# Altium PCB card.PcbDoc
Units mil, origin at the board's own origin, x right, y up, seen from the top; angles counter-clockwise.
Board outline 6000 x 4000 mil, 2 copper layers (Top Layer, Bottom Layer); 45 components, 33 nets, 210 pads, 63 vias.
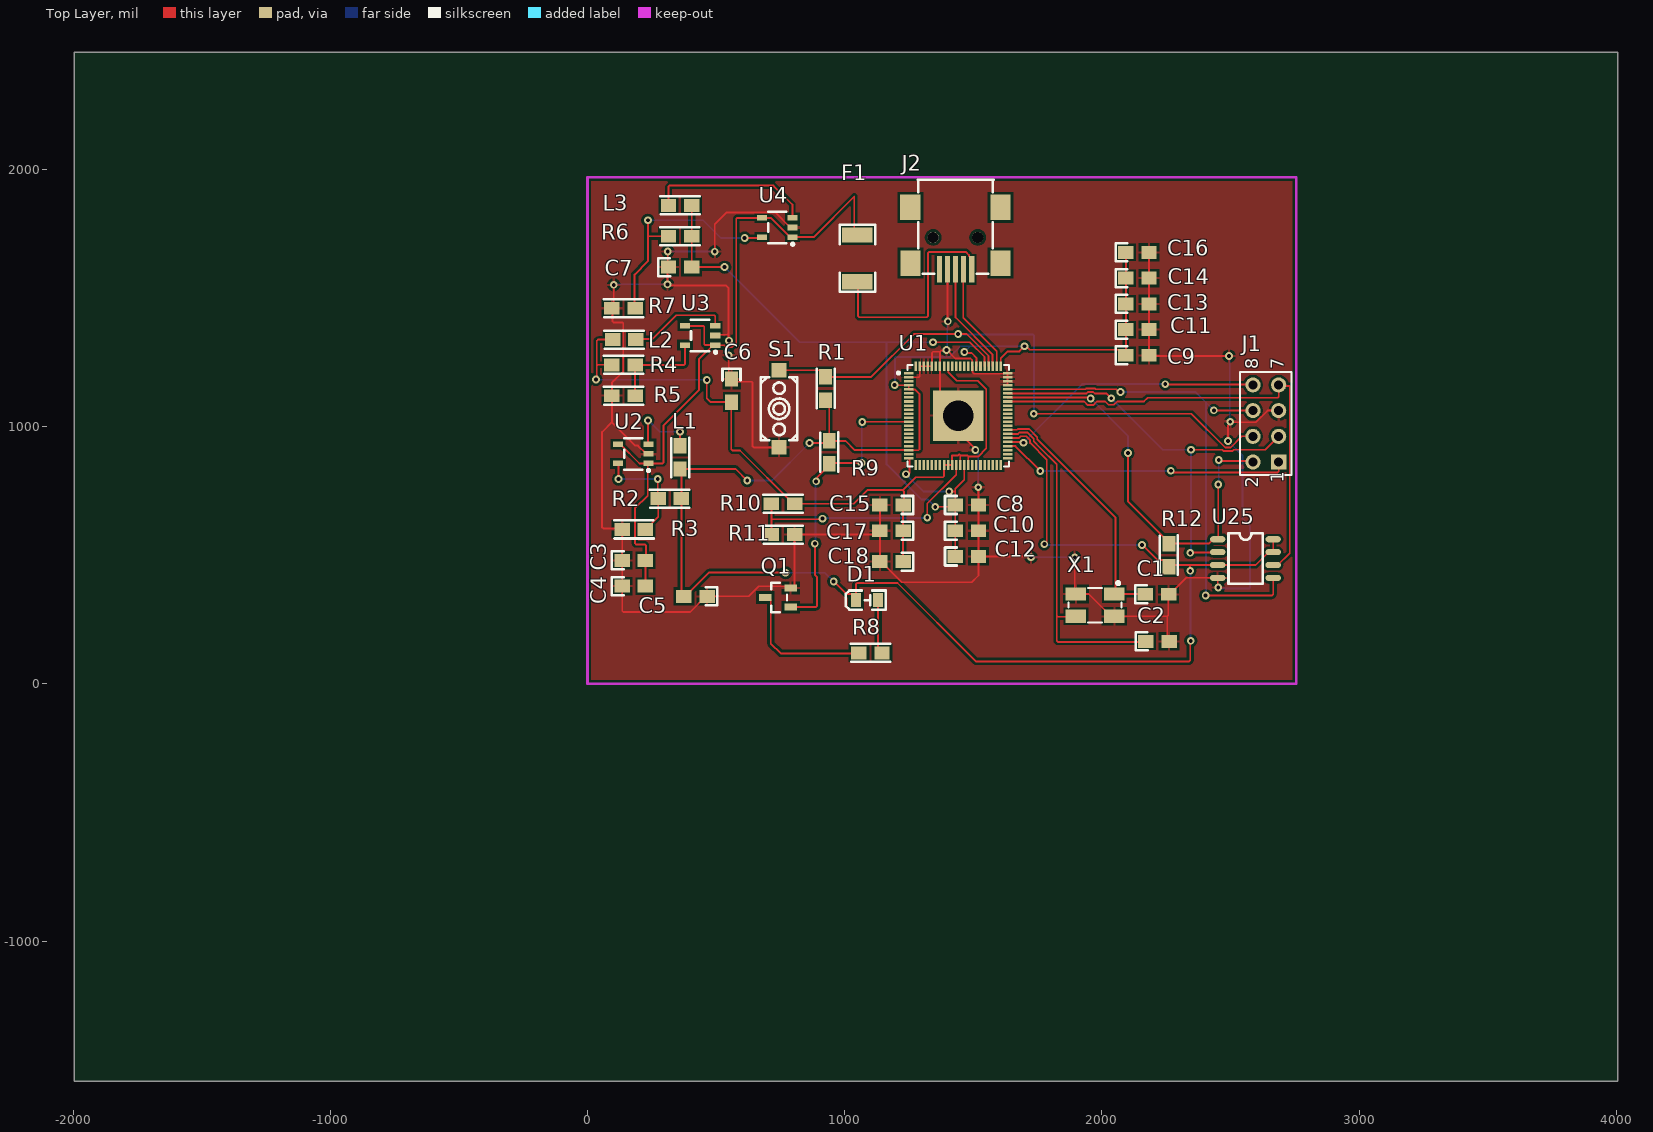
[diagram p0: Top Layer view]
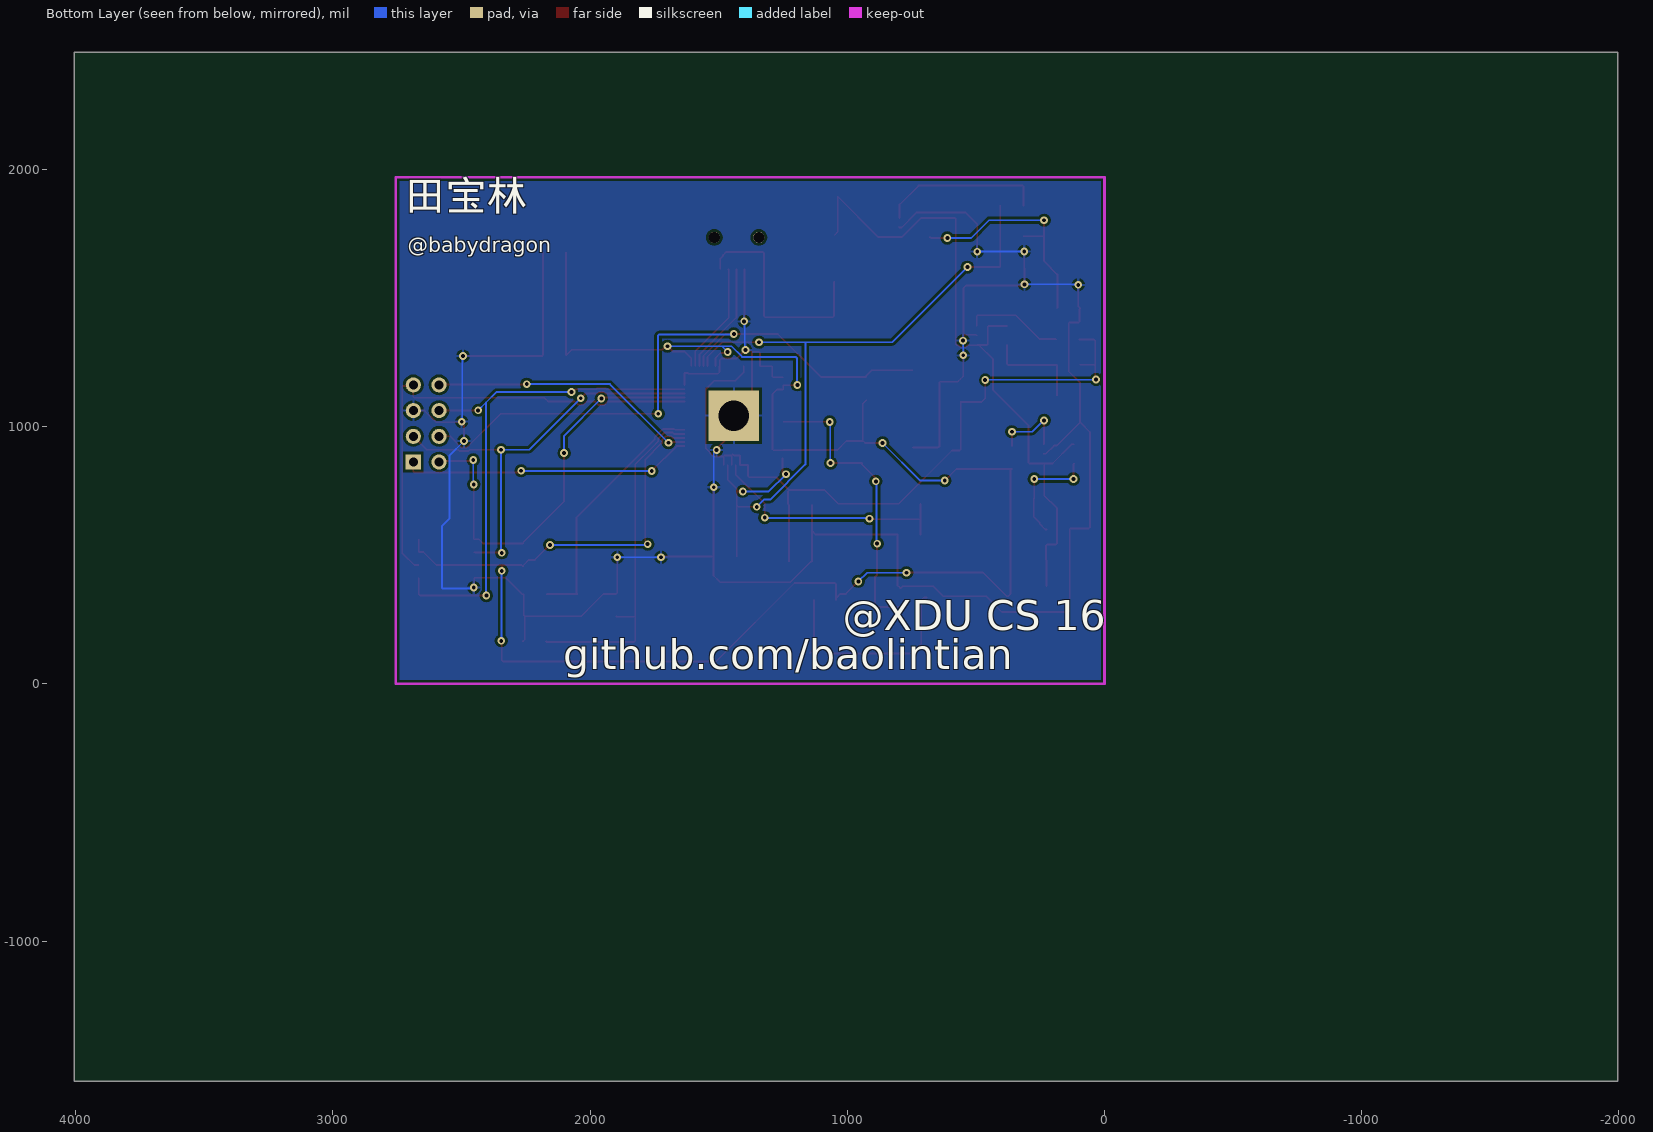
[diagram p1: Bottom Layer view, seen from below]

## Layer stack, top to bottom
Top Solder: solder mask 0.4, Solder Resist, Dk 3.5
Top Layer: signal copper 1.4
Dielectric1: dielectric 12.6, FR-4, Dk 4.8
Bottom Layer: signal copper 1.4
Bottom Solder: solder mask 0.4, Solder Resist, Dk 3.5

## Board outline
-1995,-1545 4005,-1545 4005,2455 -1995,2455

## Design rules (kind name [scope] priority, off if disabled: settings)
Clearance [All] p1: gap=7 ignorepadtopadclearanceinfootprint=TRUE
FabricationTestPointUsage TestPointUsage [All] p1: valid=0 allowmultiple=FALSE
FabricationTestpoint Testpoint [All] p1: side=3 testpointundercomponent=TRUE minsize=40 maxsize=100 preferedsize=60 minholesize=0 maxholesize=40 preferedholesize=32 testpointgrid=1 allowsidetop=TRUE allowsidebottom=TRUE usegrid=TRUE gridtolerance=0.01
HoleSize [All] p1: absolutevalues=TRUE maxlimit=10000 minlimit=1 maxpercent=80.000 minpercent=20.000
PolygonConnect [All] p1: connectstyle=Relief reliefconductorwidth=10 reliefentries=4 polygonreliefangle="90 Angle" airgapwidth=10
RoutingVias [All] p1: holewidth=15 width=30 viastyle="Through Hole" minholewidth=12 minwidth=24 maxholewidth=1000 maxwidth=1000
SMDNeckDown [All] p1: percent=95.000
SolderMaskExpansion [All] p1: expansion=4
Width [All] p1: maxlimit=100 minlimit=7 preferedwidth=7
27 further rules are at their usual default settings.

## Components (designator, comment, footprint, x,y, rotation, side; value= is the part's Value field where it differs from the comment)
C1 "30p" C0805 2214,348 r0 top value=100pF
C2 "30p" C0805 2216,165 r0 top value=100pF
C3 "2u2" C0805 180,480 r0 top value=100pF
C4 "2u2" C0805 180,380 r0 top value=100pF
C5 "22u" C0805 420,340 r180 top value=100pF
C6 "22u" C0805 560,1140 r270 top value=100pF
C7 "22u" C0805 360,1620 r0 top value=100pF
C8 "100n" C0805 1475,695 r0 top value=100pF
C9 "2u2" C0805 2138,1277 r0 top value=100pF
C10 "100n" C0805 1475,595 r0 top value=100pF
C11 "100n" C0805 2138,1377 r0 top value=100pF
C12 "100n" C0805 1475,495 r0 top value=100pF
C13 "100n" C0805 2138,1477 r0 top value=100pF
C14 "100n" C0805 2138,1577 r0 top value=100pF
C15 "1u" C0805 1182,695 r180 top value=100pF
C16 "100n" C0805 2138,1677 r0 top value=100pF
C17 "1u" C0805 1182,595 r180 top value=100pF
C18 "100n" C0805 1182,475 r180 top value=100pF
D1 "LED" LED-0805 1084,330 r0 top
F1 "Fuse 1" polyfuse 1037,1665 r90 top
J1 "Header4*2" HDR2X4 2687,862 r90 top
J2 "Mini_USB" MINi_USB_2 1431,1744 r180 top
L1 "2u2" R0805 360,880 r270 top value=10mH
L2 "2u2" R0805 143,1338 r180 top value=10mH
L3 "2u2" R0805 360,1860 r0 top value=10mH
Q1 "AO3400" SOT-23 739,344 r0 top
R1 "49.9K" R0805 926,1148 r90 top value=1K
R2 "49.9K" R0805 320,720 r180 top value=1K
R3 "11K" R0805 180,600 r0 top value=1K
R4 "36K" R0805 140,1240 r0 top value=1K
R5 "11K" R0805 140,1120 r0 top value=1K
R6 "8K2" R0805 360,1740 r180 top value=1K
R7 "10K" R0805 140,1460 r0 top value=1K
R8 "R" R0805 1100,120 r0 top value=1K
R9 "49K9" R0805 940,900 r90 top value=1K
R10 "2K2" R0805 760,700 r0 top value=1K
R11 "2K2" R0805 760,580 r0 top value=1K
R12 "3.3K" R0805 2260,500 r90 top value=1K
S1 "SW-PB" SW-2 746,1068 r90 top
U1 "F1C100S" QFN-88 1440,1020 r0 top
U2 "JW5211" SOT-23-5 180,900 r0 top
U3 "JW5211" SOT-23-5 440,1360 r0 top
U4 "JW5211" SOT-23-5 740,1780 r0 top
U25 "AT25SF081-SSHD-T" AT25SF081-SSHD-T 2560,480 r270 top
X1 "24MHz" 5032_4P_24M 1972.37,306.5 r180 top

## Footprints (in the part's own frame and the unit in brackets; to place one, negate y for a bottom-side part, rotate by r counter-clockwise, add the part's x,y. Pads: shape width x height; smd on the part's side, far side on the other; paste and mask are expansions set on the pad)
5032_4P_24M [mm]
  rect 2x1.3 smd: 1(-1.921,-1.079) 2(1.879,-1.079) 3(1.879,1.121) 4(-1.921,1.121)
  silkscreen extent -2.62,-2.31 2.58,1.72
AT25SF081-SSHD-T [mm]
  oval 0.6x1.518 smd: 1(-2.082,-2.797) 2(-0.812,-2.797) 3(0.458,-2.797) 4(1.728,-2.797) 5(1.728,2.683) 6(0.458,2.683) 7(-0.812,2.683) 8(-2.082,2.683)
  silkscreen extent -2.67,-1.73 2.32,1.64
C0805 [mil]
  rect 60x50 smd: 1(-45,0) 2(45,0)
  silkscreen extent -85,-35 -39,35
HDR2X4 [mm] "Connector; Header; 4x2 Position"
  rect 1.5x1.5 hole 0.9: 1(0,0)
  round 1.5 hole 0.9: 2(0,2.54) 3(2.54,0) 4(2.54,2.54) 5(5.08,0) 6(5.08,2.54) 7(7.62,0) 8(7.62,2.54)
  silkscreen extent -1.27,-1.27 8.89,3.81
LED-0805 [mm]
  rect 1x1.4 smd: 1(-1.032,-0.117) 2(1.168,-0.117)
  silkscreen extent -2.03,-1.07 1.92,0.83
MINi_USB_2 [mil]
  rect 78.8x98.5 smd: 0(-174.6,-107.97) 0(175.8,-107.97)
  rect 78.8x98.4 smd: 0(-174.6,108.58)
  rect 78.7x98.4 smd: 0(175.75,108.58)
  rect 19.6x102.4 smd: 1(-62.8,132.48) 2(-31.3,132.48) 3(0.2,132.48) 4(31.7,132.48) 5(63.2,132.48)
  round 43.31 hole 43.31 unplated: ""(-86,8.58) ""(87.2,8.58)
  silkscreen extent -149,-216 146,150
polyfuse [mm]
  rect 1.5x3 smd: 1(-2.586,-0.307) 2(2.024,-0.307)
  silkscreen extent -3.58,-2.06 3.02,1.44
QFN-88 [mm]
  rect 0.95x0.249 smd: 1(-4.844,4.769) 3(-4.844,3.969) 5(-4.844,3.169) 7(-4.844,2.369) 9(-4.844,1.569) 11(-4.844,0.769) 13(-4.844,-0.031) 14(-4.844,-0.43) 15(-4.844,-0.831) 16(-4.844,-1.23) 17(-4.844,-1.631) 18(-4.844,-2.03) 19(-4.844,-2.432) 20(-4.844,-2.83) 22(-4.844,-3.63) 45(4.907,-3.63) 47(4.907,-2.83) 48(4.907,-2.432) 49(4.907,-2.03) 50(4.907,-1.631) 51(4.907,-1.23) 52(4.907,-0.831) 53(4.907,-0.43) 54(4.907,-0.031) 56(4.907,0.769) 58(4.907,1.569) 60(4.907,2.369) 62(4.907,3.169) 64(4.907,3.969) 66(4.907,4.769)
  rect 0.95x0.251 smd: 2(-4.844,4.369) 4(-4.844,3.569) 6(-4.844,2.769) 8(-4.844,1.969) 10(-4.844,1.169) 12(-4.844,0.369) 21(-4.844,-3.23) 46(4.907,-3.23) 55(4.907,0.369) 57(4.907,1.169) 59(4.907,1.969) 61(4.907,2.769) 63(4.907,3.569) 65(4.907,4.369)
  rect 0.249x0.95 smd: 23(-4.169,-4.306) 24(-3.77,-4.306) 25(-3.369,-4.306) 26(-2.97,-4.306) 27(-2.569,-4.306) 28(-2.17,-4.306) 30(-1.37,-4.306) 32(-0.57,-4.306) 34(0.231,-4.306) 36(1.031,-4.306) 38(1.831,-4.306) 40(2.631,-4.306) 42(3.431,-4.306) 44(4.231,-4.306) 67(4.231,5.445) 69(3.431,5.445) 71(2.631,5.445) 73(1.831,5.445) 75(1.031,5.445) 77(0.231,5.445) 79(-0.57,5.445) 81(-1.37,5.445) 83(-2.17,5.445) 84(-2.569,5.445) 85(-2.97,5.445) 86(-3.369,5.445) 87(-3.77,5.445) 88(-4.169,5.445)
  rect 0.251x0.95 smd: 29(-1.77,-4.306) 31(-0.97,-4.306) 33(-0.17,-4.306) 35(0.631,-4.306) 37(1.431,-4.306) 39(2.231,-4.306) 41(3.031,-4.306) 43(3.831,-4.306) 68(3.831,5.445) 70(3.031,5.445) 72(2.231,5.445) 74(1.431,5.445) 76(0.631,5.445) 78(-0.17,5.445) 80(-0.97,5.445) 82(-1.77,5.445)
  rect 5x5 hole 3: 89(0.031,0.569)
  silkscreen extent -5.99,-4.43 5.03,5.57
R0805 [mil]
  rect 60x50 smd: 1(-45,0) 2(45,0)
  silkscreen extent -76,-35 77,35
SOT-23 [mm]
  rect 1.25x0.7 smd: 1(1.296,-1.166) 2(1.296,0.734) 3(-1.204,-0.216)
  silkscreen extent -0.6,-1.68 0.95,1.24
SOT-23-5 [mm]
  rect 1x0.55 smd: 1(1.443,-1.102) 2(1.443,-0.152) 3(1.443,0.798) 4(-1.557,0.798) 5(-1.557,-1.102)
  silkscreen extent -0.96,-1.93 1.59,1.4
SW-2 [mm]
  rect 1.4x1.5 smd: 1(-3.77,0.022) 2(3.83,0.022)
  silkscreen extent -3.07,-1.78 3.13,1.82

## Part data
C1 C2 C3 C4 C5 C6 C7 C8 C9 C10 C11 C12 C13 C14 C15 C16 C17 C18: library part Cap, "Capacitor", LatestRevisionDate=17-Jul-2002, LatestRevisionNote="Re-released for DXP Platform.", PackageDescription="Radial Cap, Thru-Hole; 2 Leads; 0.3 in Pin Spacing", PackageReference=RAD-0.3, Published=8-Jun-2000, Publisher="Altium Limited"
D1: library part LED0, "Typical INFRARED GaAs LED", LatestRevisionDate=08-Jul-2005, LatestRevisionNote="Mech Layer 1 removed.", PackageDescription="LED; 2 Leads", PackageReference=LED-0, Published=8-Jun-2000, Publisher="Altium Limited"
F1: "Fuse", LatestRevisionDate=17-Jul-2002, LatestRevisionNote="Re-released for DXP Platform.", PackageDescription="Thru-Hole; 2 Leads", PackageReference=PIN-W2/E2.8, Published=8-Jun-2000, Publisher="Altium Limited"
L1 L2 L3: library part Inductor, "Inductor", Code_IEC=1005, Code_JEITA=0402, LatestRevisionDate=29-May-2009, LatestRevisionNote="IPC-7351 Footprint Added.", PackageDescription="Chip Inductor", PackageReference=0402-A, Published=8-Jun-2000, Publisher="Altium Limited"
Q1: "N-Channel Power MOSFET", ComponentLink1Description="Manufacturer Link", ComponentLink1URL=http://www.irf.com/, DatasheetVersion=PD-9.814, LatestRevisionDate=17-Jul-2002, LatestRevisionNote="Re-released for DXP Platform.", Note="Pin 2 is electrically connected to pin 4.", PackageDescription="TO, Thru-Hole, Vertical, Heatsink Mounted; 3 In-Line Leads; Pitch 2.54 mm", PackageReference=TO-220AB, PackageVersion=Feb-1997, Published=8-Jun-2000, Publisher="Altium Limited"
R1 R2 R3 R4 R5 R6 R7 R8 R9 R10 R11 R12: library part Res1, "Resistor", LatestRevisionDate=17-Jul-2002, LatestRevisionNote="Re-released for DXP Platform.", PackageDescription="Axial Device, Thru-Hole; 2 Leads; 0.3 in Pin Spacing", PackageReference=AXIAL-0.3, Published=8-Jun-2000, Publisher="Altium Limited"
S1: "Switch", LatestRevisionDate=17-Jul-2002, LatestRevisionNote="Re-released for DXP Platform.", PackageReference=SPST-2, Published=24-Mar-1999, Publisher="Altium Limited"
U1: "树莓派 全志"
U2 U3 U4: BOM_LCSC Assembly=Yes, BOM_Manufacturer="JoulWatt Tech", BOM_Manufacturer Part=JW5211, BOM_Supplier=LCSC, BOM_Supplier Part=C371423, Contributor=LCSC, SMT Type=Extend, spicePre=U, spiceSymbolName=JW5211
X1: BOM_LCSC Assembly=Yes, BOM_Manufacturer="Nihon Dempa Kogyo", BOM_Manufacturer Part=NX3225GA-24MHZ(STD-CRG-2), BOM_Supplier=LCSC, BOM_Supplier Part=C156248, Contributor=LCSC, nameAlias=Frequency, SMT Type=Extend, spicePre=X, spiceSymbolName=NX3225GA-24MHZ(STD-CRG-2)

## Via types
v1: diameter 30, hole 15, Top Layer to Bottom Layer, 62 vias
v2: diameter 25.98, hole 12.99, Top Layer to Bottom Layer, 1 vias

## Nets (pads, with @x,y where several pads share a name; then routed paths per layer and width w, separated by ;. In a path a pad name is that pad's centre, name@x,y a point inside that pad or via, vN(x,y) a via of type N, cw(c..) or ccw(c..) an arc to the next point about the centre after c; other vN are vias at no path point)
+1V1: C7.2 C8.1 C10.1 C12.1 L3.2 R6.1 U1.22 U1.35 U1.71 | length 3038.5
  Top Layer w7: L3.2 R6.1 C7.2 v1(533,1620) ; v1(1238,815) 1242.1,819.1 1252,819.1 1252,875.67 1250.6,877.07 U1.22 ; v1(1343,1328) 1486,1328 1543.58,1270.42 U1.71 ; v1(1352,688) 1423,688 C8.1 ; v1(1406,748) 1430,748 ; C12.1 C10.1 C8.1 ; U1.35 1464.83,793.47 1430,758.65 1430,748 ; C8.1 1430,748
  Bottom Layer w7: v1(533,1620) 825,1328 1163,1328 ; v1(1238,815) 1305,748 v1(1406,748) ; v1(1343,1328) 1163,1328 ; v1(1352,688) 1352,689 1325,716 1300,716 1163,853 1163,1328
+2V5: C6.2 C15.1 C17.1 C18.1 L2.2 R4.1 R10.2 U1.30 U1.31 U1.32 U1.34 U1.36 U1.80 | length 3067.8
  Top Layer w7: v1(33,1183) 36,1186 36,1235.9 ; R4.1 40.1,1240 36,1235.9 ; L2.2 41,1338 36,1333 36,1235.9 ; v1(464,1181) 464,1110 479,1095 C6.2 559,1094 559,911.1 563.1,907 593,907 800,700 R10.2 1035,700 1088,753 1225.9,753 ; C18.1 C17.1 C15.1 1230,698 1230,748.9 1225.9,753 ; U1.80 1402.18,1234.02 1402.18,1211.32 1435.24,1178.26 1517.09,1178.26 1550.15,1145.19 1550.15,915.09 1518.56,883.5 1480.87,883.5 1480.58,883.8 ; U1.34 1449.08,887.9 ; U1.36 1480.58,883.8 ; 1225.9,753 1275.9,803 1381.98,803 1386.08,807.1 U1.30 U1.31 U1.32 1417.58,887.9 1440.87,887.9 1444.98,892 1449.08,887.9 ; 1449.08,887.9 1476.48,887.9 1480.58,883.8
  Bottom Layer w7: v1(33,1183) 34,1182 463,1182 v1(464,1181)
+3V3: C5.2 C9.1 C11.1 C13.1 C14.1 C16.1 D1.1 L1.2 R1.1 R2.1 R9.2 R12.1 U1.4 U1.5 U1.20 U1.50 U1.67 U1.73 U25.3 U25.7 U25.8 | length 7877.3
  Top Layer w7: v1(621,790) 576,835 L1.2 365,830 R2.1 365,350 C5.2 380,340 473,433 769,433 v1(770,432) ; v1(863,936) 931,936 R9.2 ; R1.1 940,1089 R9.2 ; v1(957,398) 1005.54,349.46 1027.18,349.46 D1.1@1043.37,333.28 ; D1.1 D1.1@1043.37,333.28 ; v1(1194,1162) 1195.13,1160.87 1248.93,1160.87 U1.4 U1.5 1249.58,1144.47 1272.33,1144.47 1291,1125.79 1291,912.1 1286.9,908 1278.74,908 1278.48,908.27 1249.58,908.27 U1.20 1039.43,908.57 1004,944 941,944 R9.2 ; v1(1465,1290) 1469,1286 1494,1286 1512.08,1267.92 U1.73 ; U1.67 1606.58,1265.58 1633,1292 1679,1292 v1(1699,1312) 1705.22,1312 1718.72,1298.5 2071.5,1298.5 C9.1 C11.1 C13.1 C14.1 C16.1 ; U1.50 1677.71,955.77 1684.44,962.5 1705.56,962.5 1720.5,947.56 1720.5,936.7 1785.5,871.7 1785.5,552.5 v1(1776,543) ; v1(2156,540) 2214.5,481.5 2238.5,481.5 2260,460 R12.1 2266.97,461.97 2342,461.97 ; v1(2343,439) 2342,440 2342,461.97 ; v1(2345,167) 2343,165 2343,91.1 2338.9,87 1510.2,87 1205.2,392 1047.47,392 1043.37,387.9 D1.1@1043.37,333.28 ; U25.8 U25.7 2647.56,511.97 2597.56,461.97 U25.3 2342,461.97
  Bottom Layer w7: v1(621,790) 717,790 v1(863,936) ; v1(770,432) 923,432 v1(957,398) ; v1(1194,1162) 1194,1165 1196,1167 1196,1266 1201,1271 1409,1271 1450,1312 1487,1312 ; v1(1465,1290) 1487,1312 ; v1(1699,1312) 1487,1312 ; v1(1776,543) 1779,540 v1(2156,540) ; v1(2343,439) 2344,438 2344,168 v1(2345,167)
FUSE_PWR: C3.2 C4.2 F1.2 U2.1 U2.4 U3.1 U3.4 U4.1 U4.4 | length 2758.3
  Top Layer w7: U2.4 127.54,931.4 202.35,856.6 U2.1 ; C4.2 C3.2 227,482 227,537.9 222.9,542 188.6,542 184.5,546.1 184.5,681.88 234.5,731.88 234.5,854.3 U2.1 ; U3.4 449.9,1391.4 454,1387.3 454,1320.7 458.1,1316.6 U3.1@487.94,1316.6 ; F1.2 1037,1756.77 1037,1894.33 879.27,1736.6 U4.1 787.94,1736.6 713.13,1811.4 U4.4 582.1,1811.4 578,1807.3 578,1320.1 573.9,1316 568.06,1316 560.56,1308.5 539.44,1308.5 531.94,1316 497.39,1316 U3.1 U3.1@487.94,1316.6 ; U2.1 237.2,857 291.9,857 296,861.1 296,1005 433,1142 433,1261.66 U3.1@487.94,1316.6
GND: C1.2 C2.2 C3.1 C4.1 C5.1 C6.1 C7.1 C8.2 C9.2 C10.2 C11.2 C12.2 C13.2 C14.2 C15.2 C16.2 C17.2 C18.2 J1.5 J2.4 Q1.2 R3.1 R5.1 R7.1 R11.2 S1.1 U1.2 U1.63 U1.64 U1.65 U1.66 U1.74 U1.82 U1.84 U1.85 U1.86 U1.87 U1.89 U2.2 U3.2 U4.2 U25.4 X1.2 X1.4 | length 10772.7
  Top Layer w7: v1(102,1551) 102,1467 R7.1 97,1458 97,1409.1 101.1,1405 134.9,1405 139,1400.9 139,1214.15 95,1170.15 R5.1 95,1017 ; U2.2 227.94,894 195.94,926 186,926 95,1017 ; v1(312,1681) 312,1617 311,1616 v1(311,1553) 315,1549 538,1549 548,1539 548,1361.1 ; v1(495,1680) 495,1787 540.73,1832.73 729.21,1832.73 787.94,1774 U4.2 U4.2@799.8,1777 ; U3.2 499.8,1357 543.9,1357 548,1361.1 ; v1(549,1277) 549,1196 C6.1 571,1174 637.9,1174 642,1169.9 642,923.1 646.1,919 744.57,919 S1.1 ; v1(550,1334) 548,1336 548,1361.1 ; C15.2 C17.2 ; U1.2 1287.9,1192.02 1292,1196.12 1292,1233.94 U1.87 U1.86 U1.85 U1.84 1338.88,1286.12 1343.65,1290.9 1370.33,1290.9 ; J2.4 1400.15,1610.67 1400.15,1409.85 v1(1401,1409) ; v1(1508,909) 1508,913 1441.18,979.82 v2(1441.18,1042.37) 1370.33,1113.22 U1.82 1370.33,1290.9 ; v1(1519,764) 1520,763 C8.2 C10.2 C12.2 ; U1.63 U1.64 U1.65 U1.66 1619.38,1207.77 1616.78,1205.17 1502.83,1205.17 1496.68,1211.32 1496.68,1234.02 U1.74 1495.98,1234.72 1495.98,1257.42 1488.89,1264.5 1429.5,1264.5 v1(1396,1298) 1393,1295 1374.43,1295 1370.33,1290.9 ; v1(1724,492) 1721,495 C12.2 ; v1(1894,492) 1894,353.39 X1.2 1948.26,349 2012.13,285.13 2012.13,284.48 2034.22,262.39 X1.4 2253.9,262.39 ; C16.2 C14.2 C13.2 C11.2 C9.2 2186,1274 v1(2494,1274) ; C2.2 2253.9,172.1 2253.9,262.39 ; v1(2452,374) 2449.88,376.12 U25.4 2327.97,411.97 2264,348 C1.2 2258,347 2258,266.49 2253.9,262.39 ; v1(2490,944) 2490,1003.78 2499,1012.78 v1(2499,1019) 2501,1017 2598.61,1017 2643.61,1062 J1.5 ; 95,1017 57,979 57,608.1 61.1,604 131,604 R3.1 C3.1 C4.1 135,283.1 139.1,279 399,279 460,340 C5.1 627,340 666,379 783.89,379 Q1.2 794.72,372.88 805,383.16 R11.2 1122,580 C17.2 ; C17.2 C18.2 1142,475 1222,395 1494,395 1520,421 C12.2
  Bottom Layer w7: v1(102,1551) 104,1553 v1(311,1553) ; v1(312,1681) 494,1681 v1(495,1680) ; v1(549,1277) 549,1333 v1(550,1334) ; v1(1396,1298) 1398.5,1300.5 1398.5,1406.5 v1(1401,1409) ; v1(1508,909) 1519,898 v1(1519,764) ; v1(1724,492) v1(1894,492) ; v1(2452,374) 2456,370 2571.9,370 2576,374.1 2576,612.94 2546.97,641.97 2546.97,887.03 v1(2490,944) ; v1(2494,1274) 2496.5,1271.5 2496.5,1021.5 v1(2499,1019)
JTAG_TCK: U1.53
JTAG_TDI: U1.57
JTAG_TDO: U1.55
JTAG_TMS: U1.58
NetC1_1: C1.1 U1.52 X1.1 | length 989.4
  Top Layer w7: U1.52 1669.61,987.27 1672.84,990.5 1717.16,990.5 1748.5,959.16 1748.5,950.5 2053,646 2053,354 X1.1 2168,349 C1.1
NetC2_1: C2.1 U1.51 X1.3 | length 1362.5
  Top Layer w7: U1.51 1673.71,971.57 1678.64,976.5 1711.36,976.5 1734.5,953.36 1734.5,942.5 1759.1,917.9 1824,853 1824,265.1 ; X1.3 1897.01,261 1828.1,261 1824,265.1 ; C2.1 2169,163 1828.1,163 1824,167.1 1824,265.1
NetD1_2: D1.2 R8.2 | length 211.6
  Top Layer w7: D1.2 1129.98,135.02 R8.2
NetL1_1: L1.1 U2.3 | length 291.6
  Top Layer w7: v1(235,1024) 235,933.2 U2.3 ; L1.1 v1(360,980)
  Bottom Layer w7: v1(235,1024) 237,1024 281,980 v1(360,980)
NetL2_1: L2.1 U3.3 | length 387.3
  Top Layer w7: L2.1 191,1341 253,1341 345,1433 492.7,1433 496.8,1428.9 U3.3
NetL3_1: L3.1 U4.3 | length 638.8
  Top Layer w7: L3.1 315,1932.9 319.1,1937 723,1937 796.8,1863.2 U4.3
NetQ1_3: Q1.3 R8.1 | length 553.3
  Top Layer w7: Q1.3 702.43,335.48 712.71,325.2 712.71,156.29 751,118 1053,118 R8.1
NetR2_2: R2.2 R3.2 U2.5 | length 434
  Top Layer w7: U2.5 121,854.28 v1(121,796) ; R3.2 230,600 251.5,621.5 251.5,626.5 275,650 R2.2 273,722 v1(273,796)
  Bottom Layer w7: v1(121,796) v1(273,796)
NetR4_2: R4.2 R5.2 U3.5 | length 389.7
  Top Layer w7: R5.2 R4.2 186,1239 374.9,1239 379,1243.1 379,1316 378.69,1316.31 U3.5
NetR6_2: R6.2 R7.2 U4.5 | length 919.4
  Top Layer w7: R7.2 183,1462 183,1591 235,1643 235,1743.1 ; v1(235,1802) 235,1743.1 ; R6.2 238.1,1740 235,1743.1 ; v1(611,1733) 675.09,1733 U4.5
  Bottom Layer w7: v1(235,1802) 449,1802 518,1733 v1(611,1733)
NetR10_1: R10.1 R11.1 U1.33 | length 979.5
  Top Layer w7: R11.1 715,640 ; R10.1 715,640 ; v1(914,642) 912,640 715,640 ; v1(1321,646) 1321,701 1433.33,813.33 U1.33
  Bottom Layer w7: v1(914,642) 916,644 1319,644 v1(1321,646)
R\E\S\E\T\: J1.4 R1.2 S1.2 U1.70 | length 2498.4
  Top Layer w7: S1.2 904.5,1218.77 926,1197.27 R1.2 1102.75,1193 1269.75,1360 v1(1441,1360) 1473.8,1360 1559.33,1274.47 U1.70 ; v1(1735,1050) 2347.94,1050 2479.44,918.5 2500.56,918.5 2544.06,962 J1.4
  Bottom Layer w7: v1(1441,1360) 1443,1358 1731.9,1358 1736,1353.9 1736,1051 v1(1735,1050)
SCL: U1.38
SDA: U1.37
SPI_CLK: J1.7 U1.59 U25.6 | length 1907.7
  Top Layer w7: U1.59 1931.42,1097.52 1945.44,1083.5 1966.56,1083.5 1980.58,1097.52 2012.42,1097.52 2025.44,1084.5 2046.56,1084.5 2059.58,1097.52 2162.95,1097.52 2177.43,1112 2682.9,1112 2687,1116.1 J1.7 2691.1,1157.9 2730,1157.9 2730,508.27 2683.7,461.97 U25.6
SPI_CS: J1.2 R12.2 U1.60 U25.1 | length 1657.5
  Top Layer w7: U1.60 1633.48,1112.97 1952.03,1112.97 v1(1956,1109) ; v1(2101,897) 2101,709 2260,550 R12.2 2414.84,545 2431.81,561.97 U25.1 2452,564.09 v1(2452,775) ; v1(2454,870) 2458,866 2583,866 J1.2
  Bottom Layer w7: v1(1956,1109) 2101,964 v1(2101,897) ; v1(2452,775) 2454,777 v1(2454,870)
SPI_MISO: J1.3 U1.61 U25.2 | length 1685.5
  Top Layer w7: U1.61 1939.96,1129.02 1945.44,1134.5 1966.56,1134.5 1972.04,1129.02 2016.98,1129.02 v1(2036,1110) ; v1(2343,509) 2344.48,510.49 2448.4,510.49 U25.2 ; v1(2346,910) 2468.14,910 2473.64,904.5 2506.36,904.5 2511.86,910 2635,910 J1.3
  Bottom Layer w7: v1(2036,1110) 2236,910 v1(2346,910) 2346,514 2343,511 v1(2343,509)
SPI_MOSI: J1.6 U1.62 U25.5 | length 2070.6
  Top Layer w7: U1.62 1935.91,1144.77 1939.64,1148.5 1972.36,1148.5 1976.09,1144.77 2055.01,1144.77 2065.78,1134 v1(2072,1134) ; v1(2403,343) 2660,343 2665.63,348.63 U25.5 ; v1(2435,1063) 2435.5,1062.5 2586.5,1062.5 J1.6
  Bottom Layer w7: v1(2072,1134) 2364,1134 2404.5,1093.5 ; v1(2403,343) 2404.5,344.5 2404.5,1093.5 ; v1(2435,1063) 2404.5,1093.5
STATUS: Q1.1 R9.1 U1.13 | length 1152.1
  Top Layer w7: Q1.1 887.9,298.08 892,302.18 892,416.48 884,424.48 v1(884,545) ; v1(889,787) 893.4,791.4 893.4,803.4 943,853 943,858 v1(1065,858) ; v1(1068,1018) 1068.77,1018.77 U1.13
  Bottom Layer w7: v1(884,545) 886.5,547.5 886.5,784.5 v1(889,787) ; v1(1065,858) 1066,859 1066,1016 v1(1068,1018)
UART_RX: J1.8 U1.49 | length 1050.8
  Top Layer w7: U1.49 1691.93,940.07 v1(1695,937) ; v1(2246,1165) 2247.5,1163.5 2585.5,1163.5 J1.8
  Bottom Layer w7: v1(1695,937) 1923,1165 v1(2246,1165)
UART_TX: J1.1 U1.48 | length 1135.1
  Top Layer w7: U1.48 1663.55,924.27 1760,827.82 v1(1760,827) ; v1(2268,828) 2274.03,821.97 2682.9,821.97 2687,826.07 J1.1
  Bottom Layer w7: v1(1760,827) 2267,827 v1(2268,828)
USB_DM: J2.2 U1.68 | length 431.5
  Top Layer w7: J2.2 1461,1610.22 1461,1423 1590.83,1293.17 U1.68
USB_DP: J2.3 U1.69 | length 436.9
  Top Layer w7: J2.3 1431,1611.32 1431,1424 1575.08,1279.92 U1.69
USB_VBUS: F1.1 J2.1 | length 881.3
  Top Layer w7: F1.1 1052,1560.28 1052,1429.1 1056.1,1425 1318.9,1425 1324,1430.1 1324,1674.9 1328.1,1679 1470.67,1679 1482.6,1667.07 1482.6,1664.12 1493.8,1652.92 J2.1
pads on no net: J2. J2.0 J2.5 U1.1 U1.3 U1.6 U1.7 U1.8 U1.9 U1.10 U1.11 U1.12 U1.14 U1.15 U1.16 U1.17 U1.18 U1.19 U1.21 U1.23 U1.24 U1.25 U1.26 U1.27 U1.28 U1.29 U1.39 U1.40 U1.41 U1.42 U1.43 U1.44 U1.45 U1.46 U1.47 U1.54 U1.56 U1.72 U1.75 U1.76 U1.77 U1.78 U1.79 U1.81 U1.83 U1.88

## Polygon pours and split planes (outlines as drawn)
GND on Top Layer "Top Layer-GND" (solid, remove dead copper, pour order 1): -1995,-1545 4005,-1545 4005,2455 -1995,2455
GND on Bottom Layer "Button Layer-No Net" (solid, remove dead copper, pour order 0): -1995,-1545 4005,-1545 4005,2455 -1995,2455

## Keep-outs
Keep-Out Layer:
  lines w10: 0,0 2755.91,0 2755.91,1968.5 0,1968.5 0,0

## Silkscreen, mask and mechanical layers (free items; w line width, h text height)
Bottom Overlay:
  text "田宝林" at 2720,1803 h200
  text "@babydragon" at 2709,1658 h100
  text "@XDU CS 16" at 1017,170 h200
  text "github.com/baolintian" at 2105,17 h200

## Text inside footprints (layer, text, board x,y; h text height)
J1: Top Overlay "8" at 2607,1222 h50 r90; Top Overlay "7" at 2707,1222 h50 r90; Top Overlay "1" at 2707,782 h50 r90; Top Overlay "2" at 2607,762 h50 r90